# Altium PCB Sampler_4HP.PCBDOC (part 5 of 6)
Units mm, origin at the board's own origin, x right, y up, seen from the top; angles counter-clockwise.
Board outline 159.99 x 100 mm, 4 copper layers (Top, GP1(GND), L3, Bot), stack 1.648 mm thick; 546 components, 321 nets, 1657 pads, 795 vias.
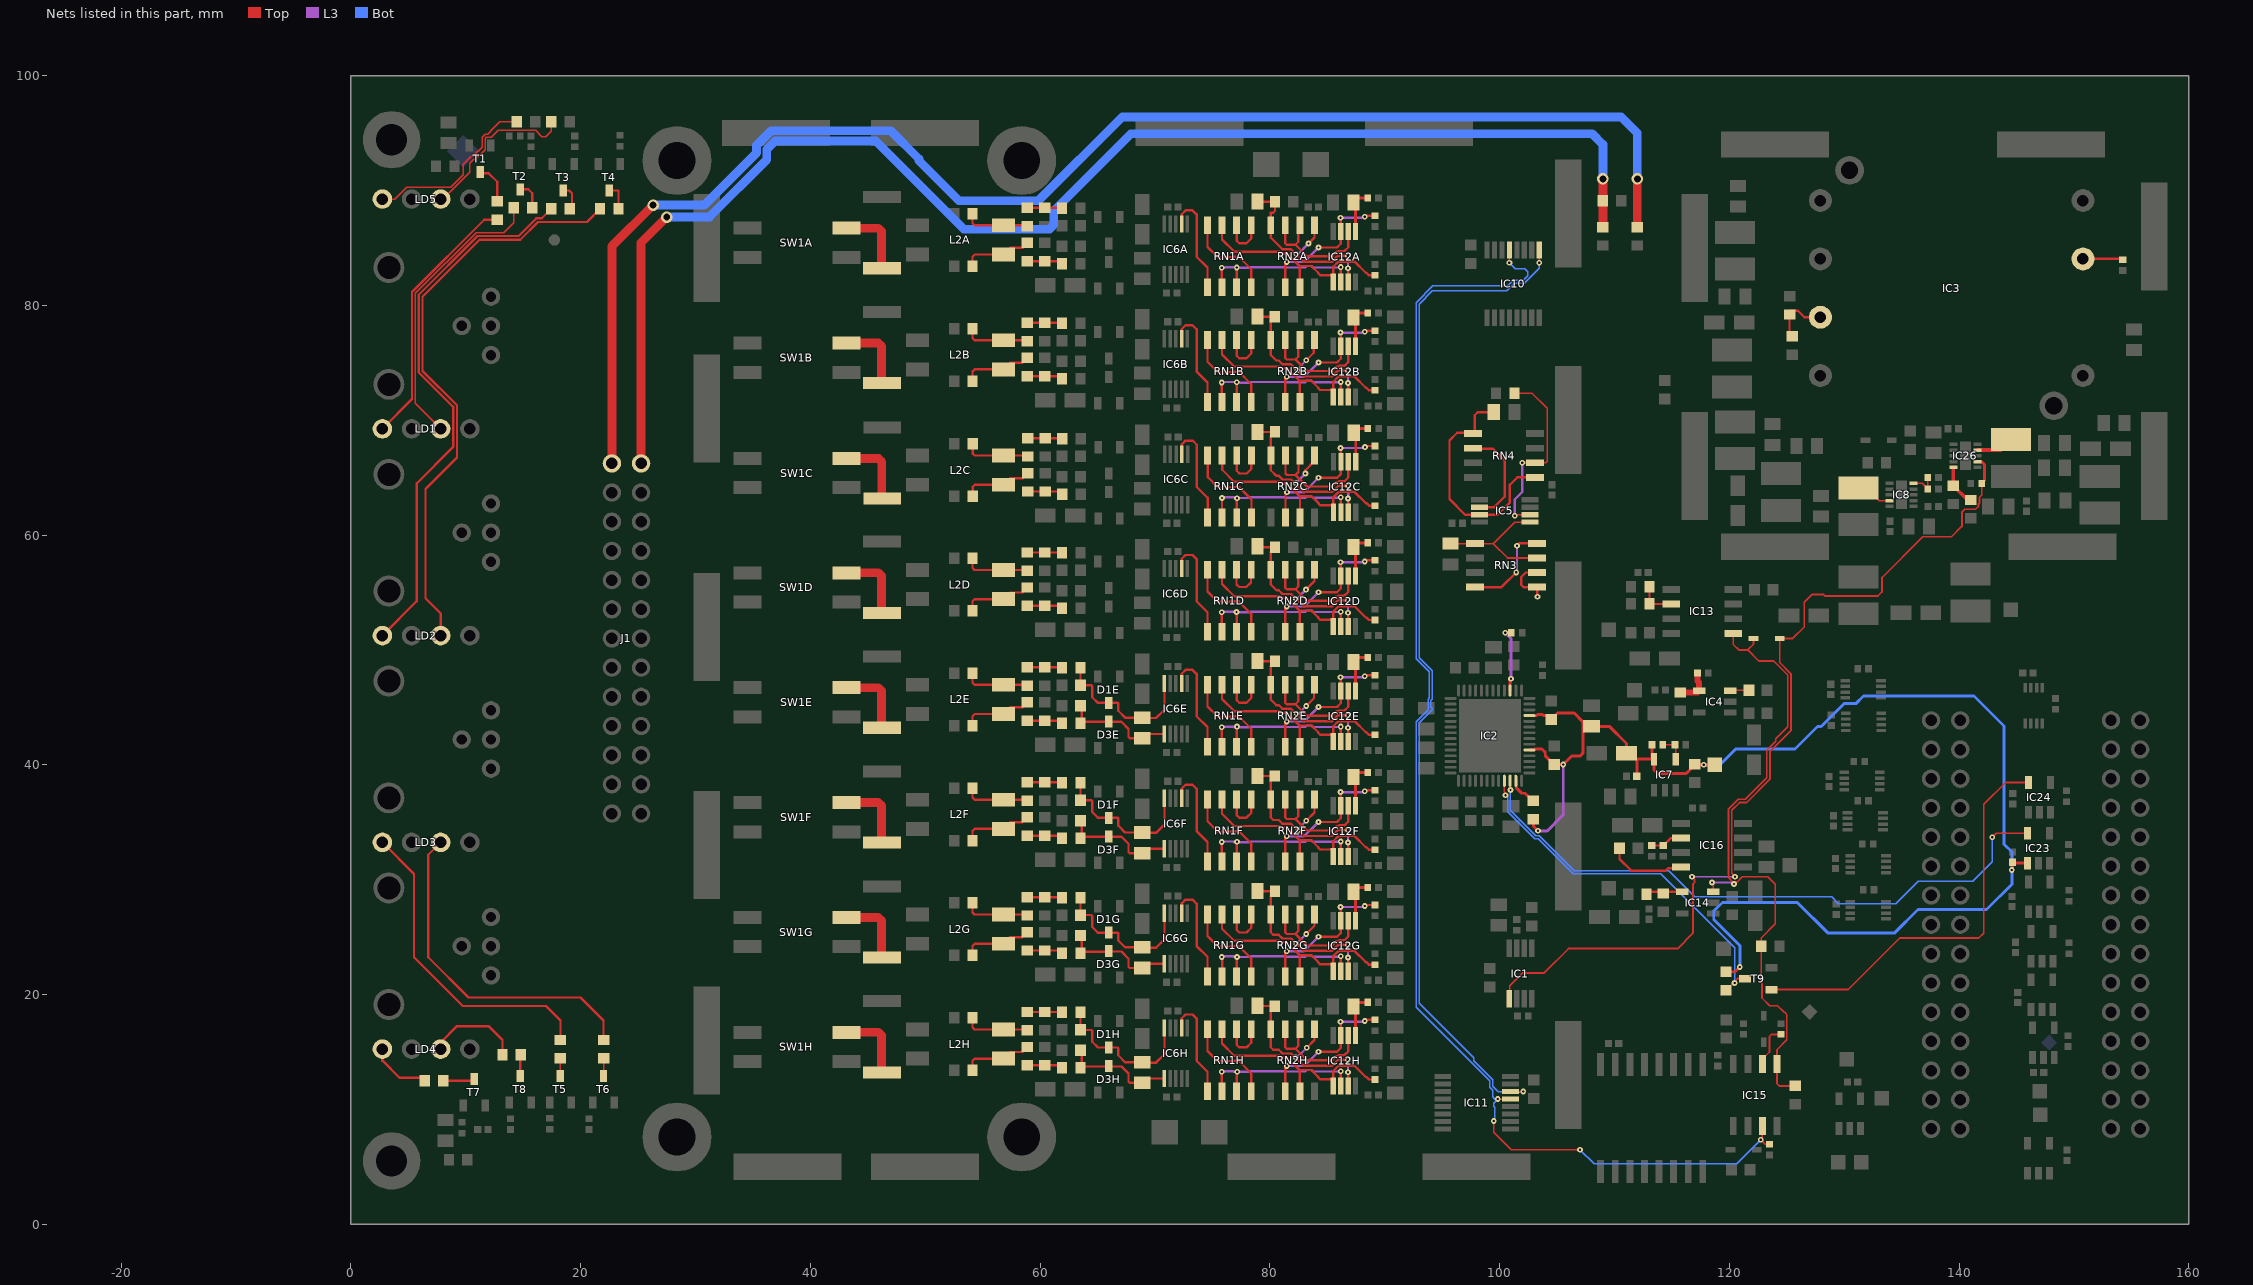
[diagram p6: the nets of this part, all layers, seen from the top]

## Via types
v1: diameter 0.5, hole 0.2, Top to Bot, tented both sides, 760 vias
v2: diameter 0.6, hole 0.3, Top to Bot, tented both sides, 15 vias
v3: diameter 1, hole 0.6, Top to Bot, tented both sides, 8 vias
v4: diameter 0.5, hole 0.2, Top to Bot, 6 vias
v5: diameter 0.6, hole 0.3, Top to Bot, 6 vias

## Nets (pads, with @x,y where several pads share a name; then routed paths per layer and width w, separated by ;. In a path a pad name is that pad's centre, name@x,y a point inside that pad or via, vN(x,y) a via of type N, cw(c..) or ccw(c..) an arc to the next point about the centre after c; other vN are vias at no path point) (continued)
NetC72E_1: C72E.1 C88E.2 D3E.3 IC6E.1 R42E.2 | length 9.7
  Top w0.203: C88E.2@63.638,45.02 63.638,43.736 65.949,43.736 D3E.3@65.955,43.742 ; D3E.3@65.989,43.776 D3E.3@65.955,43.742 ; IC6E.1@70.831,42.687 69.261,42.687 C72E.1@68.885,42.31 67.805,42.31 67.698,42.418 67.698,43.124 67.08,43.742 D3E.3@65.955,43.742
NetC72E_2: C72E.2 C85E.2 D1E.3 IC6E.10 R34E.2 | length 13.5
  Top w0.203: R34E.2@63.518,48.442 C85E.2@63.518,46.918 64.459,46.918 64.539,46.838 64.539,45.888 65.039,45.388 D1E.3@65.989,45.388 66.758,45.388 66.802,45.344 66.802,44.709 67.401,44.11 C72E.2@68.885,44.11 68.921,44.074 70.104,44.074 70.831,44.801 IC6E.10@70.831,47.087
NetC72F_1: C72F.1 C88F.2 D3F.3 IC6F.1 R42F.2 | length 9.7
  Top w0.203: C88F.2@63.638,35.02 63.638,33.736 65.949,33.736 D3F.3@65.955,33.742 ; D3F.3@65.989,33.776 D3F.3@65.955,33.742 ; IC6F.1@70.831,32.687 69.261,32.687 C72F.1@68.885,32.31 67.805,32.31 67.698,32.418 67.698,33.124 67.08,33.742 D3F.3@65.955,33.742
NetC72F_2: C72F.2 C85F.2 D1F.3 IC6F.10 R34F.2 | length 13.5
  Top w0.203: R34F.2@63.518,38.442 C85F.2@63.518,36.918 64.459,36.918 64.539,36.838 64.539,35.888 65.039,35.388 D1F.3@65.989,35.388 66.758,35.388 66.802,35.344 66.802,34.709 67.401,34.11 C72F.2@68.885,34.11 68.921,34.074 70.104,34.074 70.831,34.801 IC6F.10@70.831,37.087
NetC72G_1: C72G.1 C88G.2 D3G.3 IC6G.1 R42G.2 | length 9.7
  Top w0.203: C88G.2@63.638,25.02 63.638,23.736 65.949,23.736 D3G.3@65.955,23.742 ; D3G.3@65.989,23.776 D3G.3@65.955,23.742 ; IC6G.1@70.831,22.687 69.261,22.687 C72G.1@68.885,22.31 67.805,22.31 67.698,22.418 67.698,23.124 67.08,23.742 D3G.3@65.955,23.742
NetC72G_2: C72G.2 C85G.2 D1G.3 IC6G.10 R34G.2 | length 13.5
  Top w0.203: R34G.2@63.518,28.442 C85G.2@63.518,26.918 64.459,26.918 64.539,26.838 64.539,25.888 65.039,25.388 D1G.3@65.989,25.388 66.758,25.388 66.802,25.344 66.802,24.709 67.401,24.11 C72G.2@68.885,24.11 68.921,24.074 70.104,24.074 70.831,24.801 IC6G.10@70.831,27.087
NetC72H_1: C72H.1 C88H.2 D3H.3 IC6H.1 R42H.2 | length 9.7
  Top w0.203: C88H.2@63.638,15.02 63.638,13.736 65.949,13.736 D3H.3@65.955,13.742 ; D3H.3@65.989,13.776 D3H.3@65.955,13.742 ; IC6H.1@70.831,12.687 69.261,12.687 C72H.1@68.885,12.31 67.805,12.31 67.698,12.418 67.698,13.124 67.08,13.742 D3H.3@65.955,13.742
NetC72H_2: C72H.2 C85H.2 D1H.3 IC6H.10 R34H.2 | length 13.5
  Top w0.203: R34H.2@63.518,18.442 C85H.2@63.518,16.918 64.459,16.918 64.539,16.838 64.539,15.888 65.039,15.388 D1H.3@65.989,15.388 66.758,15.388 66.802,15.344 66.802,14.709 67.401,14.11 C72H.2@68.885,14.11 68.921,14.074 70.104,14.074 70.831,14.801 IC6H.10@70.831,17.087
NetC73A_2: C73A.2 IC12A.3 R73A.2 RN2A.1 RN2A.4 | length 18.6
  Top w0.203: C73A.2@78.925,88.775 C73A.2@78.925,89.025 80.425,89.025 R73A.2@80.45,89 80.45,88.225 80.295,88.07 80.08,88.07 RN2A.4@80.08,86.975 80.08,85.895 81.1,84.875 81.85,84.875 v1@82.25,84.475 ; v1(82.3,84.475) v1@82.25,84.475 ; v1(83.375,85.375) 83.89,85.89 RN2A.1@83.89,86.975 ; v1(86.8,84.325) 85.95,84.325 85.425,83.8 82.925,83.8 v1@82.25,84.475 ; v1(86.804,83.229) 86.825,83.208 IC12A.3@86.825,82.029
  L3 w0.203: v1(82.3,84.475) 82.475,84.475 v1(83.375,85.375) ; v1(86.8,84.325) 86.804,84.321 v1(86.804,83.229)
NetC73B_2: C73B.2 IC12B.3 R73B.2 RN2B.1 RN2B.4 | length 18.2
  Top w0.203: C73B.2@78.925,79.025 78.95,79 80.4,79 80.08,78.68 RN2B.4@80.08,76.975 80.08,75.675 80.559,75.196 80.779,75.196 81.1,74.875 81.85,74.875 v1(82.388,74.337) 82.925,73.8 85.425,73.8 85.95,74.325 v1(86.8,74.325) ; v1(83.175,75.225) 83.825,75.875 83.825,76.91 RN2B.1@83.89,76.975 ; v1(86.804,73.229) 86.825,73.208 IC12B.3@86.825,72.029
  L3 w0.203: v1(82.388,74.337) 82.388,74.438 v1(83.175,75.225) ; v1(86.8,74.325) 86.804,74.321 v1(86.804,73.229)
NetC73C_2: C73C.2 IC12C.3 R73C.2 RN2C.1 RN2C.4 | length 18.1
  Top w0.203: C73C.2@78.938,68.981 78.944,68.975 R73C.2@80.45,68.975 80.093,68.618 RN2C.4@80.093,66.932 80.093,65.65 80.59,65.153 80.791,65.153 81.113,64.831 81.863,64.831 82.938,63.756 85.438,63.756 85.963,64.281 v1(86.813,64.281) ; v1(83.1,65.35) 83.1,65.65 83.903,66.453 RN2C.1@83.903,66.932 ; v1(86.817,63.185) 86.838,63.165 IC12C.3@86.838,61.985
  L3 w0.203: v1(82.25,64.5) v1(83.1,65.35) ; v1(86.813,64.281) 86.817,64.277 v1(86.817,63.185)
NetC73D_2: C73D.2 IC12D.3 R73D.2 RN2D.1 RN2D.4 | length 18.2
  Top w0.203: C73D.2@78.925,59.025 79.025,58.925 R73D.2@80.45,58.925 80.08,58.555 RN2D.4@80.08,56.975 80.08,55.7 80.584,55.196 80.779,55.196 81.1,54.875 81.85,54.875 v1(82.275,54.45) 82.925,53.8 85.425,53.8 85.95,54.325 v1(86.8,54.325) ; v1(83.15,55.25) 83.89,55.99 RN2D.1@83.89,56.975 ; v1(86.804,53.229) 86.825,53.208 IC12D.3@86.825,52.029
  L3 w0.203: v1(82.275,54.45) 82.35,54.45 v1(83.15,55.25) ; v1(86.8,54.325) 86.804,54.321 v1(86.804,53.229)
NetC73E_2: C73E.2 IC12E.3 R73E.2 RN2E.1 RN2E.4 | length 18.3
  Top w0.203: C73E.2@78.925,49.025 78.95,49 R73E.2@80.45,49 80.08,48.63 RN2E.4@80.08,46.975 80.08,45.675 80.559,45.196 80.779,45.196 81.1,44.875 81.85,44.875 82.925,43.8 85.425,43.8 85.95,44.325 v1(86.8,44.325) ; v1(83.175,45.125) 83.85,45.8 83.85,46.935 RN2E.1@83.89,46.975 ; v1(86.804,43.229) 86.825,43.208 IC12E.3@86.825,42.029
  L3 w0.203: v1(82.35,44.45) 82.5,44.45 v1(83.175,45.125) ; v1(86.8,44.325) 86.804,44.321 v1(86.804,43.229)
NetC73F_2: C73F.2 IC12F.3 R73F.2 RN2F.1 RN2F.4 | length 18.4
  Top w0.203: C73F.2@78.925,39.025 R73F.2@80.425,39.025 80.08,38.68 RN2F.4@80.08,36.975 80.08,35.42 80.304,35.196 80.779,35.196 81.1,34.875 81.85,34.875 82.925,33.8 85.425,33.8 85.95,34.325 v1(86.8,34.325) ; v1(83.175,35.125) 83.89,35.84 RN2F.1@83.89,36.975 ; v1(86.804,33.229) 86.825,33.208 IC12F.3@86.825,32.029
  L3 w0.203: v1(82.485,34.275) 82.485,34.435 v1(83.175,35.125) ; v1(86.8,34.325) 86.804,34.321 v1(86.804,33.229)
NetC73G_2: C73G.2 IC12G.3 R73G.2 RN2G.1 RN2G.4 | length 18.4
  Top w0.203: C73G.2@78.925,29.025 78.95,29 R73G.2@80.45,29 80.08,28.63 RN2G.4@80.08,26.975 80.08,25.42 80.304,25.196 80.779,25.196 81.1,24.875 81.85,24.875 v1(82.3,24.425) 82.925,23.8 85.425,23.8 85.95,24.325 v1(86.8,24.325) ; v1(83.175,25.275) 83.89,25.99 RN2G.1@83.89,26.975 ; v1(86.804,23.229) 86.825,23.208 IC12G.3@86.825,22.029
  L3 w0.203: v1(82.3,24.425) 82.325,24.425 v1(83.175,25.275) ; v1(86.8,24.325) 86.804,24.321 v1(86.804,23.229)
NetC73H_2: C73H.2 IC12H.3 R73H.2 RN2H.1 RN2H.4 | length 18.3
  Top w0.203: C73H.2@78.95,19 R73H.2@80.425,19 80.08,18.655 RN2H.4@80.08,16.975 80.08,15.42 80.304,15.196 80.779,15.196 81.1,14.875 81.85,14.875 82.925,13.8 85.425,13.8 85.95,14.325 v1(86.8,14.325) ; v1(83.225,15.375) 83.89,16.04 RN2H.1@83.89,16.975 ; v1(86.804,13.229) 86.825,13.208 IC12H.3@86.825,12.029
  L3 w0.203: v1(82.25,14.525) 82.375,14.525 v1(83.225,15.375) ; v1(86.8,14.325) 86.804,14.321 v1(86.804,13.229)
NetC74A_2: C74A.2 IC12A.5 R50A.2 | length 4
  Top w0.254: IC12A.5@87.475,86.429 87.475,88.775 C74A.2@87.3,88.95 87.675,89.325 R50A.2@88.53,89.325
NetC74B_2: C74B.2 IC12B.5 R50B.2 | length 4
  Top w0.254: IC12B.5@87.475,76.429 87.475,78.775 C74B.2@87.3,78.95 87.675,79.325 R50B.2@88.53,79.325
NetC74C_2: C74C.2 IC12C.5 R50C.2 | length 4
  Top w0.254: IC12C.5@87.488,66.385 87.488,68.731 C74C.2@87.313,68.906 87.688,69.281 R50C.2@88.543,69.281
NetC74D_2: C74D.2 IC12D.5 R50D.2 | length 4
  Top w0.254: IC12D.5@87.475,56.429 87.475,58.775 C74D.2@87.3,58.95 87.675,59.325 R50D.2@88.53,59.325
NetC74E_2: C74E.2 IC12E.5 R50E.2 | length 4
  Top w0.254: IC12E.5@87.475,46.429 87.475,48.775 C74E.2@87.3,48.95 87.675,49.325 R50E.2@88.53,49.325
NetC74F_2: C74F.2 IC12F.5 R50F.2 | length 4
  Top w0.254: IC12F.5@87.475,36.429 87.475,38.775 C74F.2@87.3,38.95 87.675,39.325 R50F.2@88.53,39.325
NetC74G_2: C74G.2 IC12G.5 R50G.2 | length 4
  Top w0.254: IC12G.5@87.475,26.429 87.475,28.775 C74G.2@87.3,28.95 87.675,29.325 R50G.2@88.53,29.325
NetC74H_2: C74H.2 IC12H.5 R50H.2 | length 4
  Top w0.254: IC12H.5@87.475,16.429 87.475,18.775 C74H.2@87.3,18.95 87.675,19.325 R50H.2@88.53,19.325
NetC75_2: C75.2 IC5.3 RN4.1 RN4.5 | length 21.1
  Top w0.203: C75.2@99.5,70.7 98.125,70.7 97.85,70.425 97.85,68.98 RN4.5@97.7,68.83 97.63,68.9 96.325,68.9 95.646,68.221 95.646,63.129 97,61.775 IC5.3@98.25,61.775 99.85,61.775 100.9,62.825 100.9,64.375 101.545,65.02 RN4.1@103.1,65.02
NetC76_2: C76.2 IC5.5 RN3.3 RN3.5 | length 12
  Top w0.152: C76.2@95.75,59.25 99.45,59.25 ; IC5.5@102.65,61.125 101.325,61.125 99.45,59.25 ; RN3.3@103.275,58.01 100.69,58.01 99.45,59.25
NetC114_1: C114.1 IC16.4 | length 6.9
  Top w0.203: C114.1@110.45,32.75 110.45,31.8 111.479,30.771 114.448,30.771 114.677,31 115.705,31 IC16.4@115.8,31.095
NetC116_1: C116.1 IC4.3 | length 1.6
  Top w0.127: IC4.3@120.1,46.45 120.15,46.5 C116.1@121.7,46.5
NetD6_1: D6.1 IC1.1 IC26.7 R57.1 | length 81
  Top w0.152: IC1.1@100.888,19.687 100.899,19.698 100.899,20.75 102.036,21.887 103.887,21.887 106,24 115.5,24 116.836,25.336 116.836,29.592 116.973,29.728 116.973,30.027 v1(116.75,30.25) ; v1(120.5,30.25) 120.5,30.292 120.222,30.57 120.222,36.042 120.9,36.72 121.515,36.72 123.537,38.742 123.537,41.142 125.364,42.968 125.364,47.933 124.39,48.906 D6.1@124.39,51 125.525,51 126.525,52 126.525,54.15 127.209,54.834 128.192,54.834 128.326,54.7 132.95,54.7 133.3,55.05 133.3,56.3 136.847,59.847 139.347,59.847 140.25,60.75 140.25,62 140.5,62.25 141.437,62.25 141.703,62.516 141.703,62.703 141.779,62.779 141.779,63.283 141.97,63.474 R57.1@141.97,64.5
  Top w0.254: IC26.7@141.602,66.395 141.971,66.395 141.971,66.361 142.033,66.299 142.057,66.299 142.206,66.15 142.206,64.736 R57.1@141.97,64.5
  L3 w0.152: v1(116.75,30.25) v1(120.5,30.25)
NetD6_2: D6.2 IC13.5 IC14.3 IC15.1 R18.1 R52.2 | length 57.2
  Top w0.152: v1(118.5,29.75) 118.6,29.65 IC14.3@118.6,28.95 ; IC13.5@120.349,51.444 120.349,50.472 120.822,50 121.6,50 ; D6.2@122.11,51 122.11,50.51 121.6,50 ; R52.2@126,12.3 R52.2@125.75,12.05 124.35,12.05 124.155,12.245 IC15.1@124.155,13.95 124.155,15.205 125.013,16.063 125.013,18.262 124.825,18.45 124.775,18.45 124.2,19.025 123.525,19.025 122.85,19.7 122.85,21 122.775,21.075 R18.1@122.775,24.2 122.775,24.925 124,26.15 124,29.6 123.35,30.25 121.141,30.25 120.688,29.797 120.312,29.797 119.953,30.156 119.953,30.443 119.942,30.454 119.942,36.158 120.784,37 121.4,37 123.258,38.858 123.258,41.258 124.042,42.042 124.042,42.266 125.084,43.308 125.084,47.817 123.867,49.034 122.566,49.034 121.6,50
  L3 w0.152: v1(118.5,29.75) 120.265,29.75 120.392,29.623 v1(120.416,29.623)
NetIC2_23: IC2.23 R2.2 T9.3 | length 33.2
  Top w0.127: IC2.23@100.42,38.61 100.42,37.665 100.514,37.571 v1(100.514,37.349)
  Top w0.152: R2.2@119.312,19.98 R2.2@119.715,20.384 120.719,21.387 T9.3@121.385,21.387
  Bot w0.127: v1(100.514,37.349) 100.701,37.162 100.701,35.917 103.062,33.556 103.367,33.556 106.406,30.517 114.031,30.517 120.465,24.083 v1(120.465,21)
NetIC2_24: IC2.24 IC23.5 | length 54.7
  Top w0.127: IC2.24@100.92,38.61 100.92,37.837 v1(100.955,37.802) ; v1(142.9,33.7) 143.236,34.036 IC23.5@145.966,34.036
  Bot w0.127: v1(100.955,37.802) 100.955,36.022 103.168,33.81 103.473,33.81 106.511,30.771 114.729,30.771 117,28.5 128.9,28.5 129.475,27.925 134.5,27.925 136.45,29.875 141.2,29.875 142.9,31.575 v1(142.9,33.7)
NetIC2_25: IC2.25 R11.2 | length 2.4
  Top w0.254: IC2.25@101.42,38.61 101.459,38.571 101.459,38.004 101.938,37.525 102.225,37.525 R11.2@102.825,36.925
NetIC2_43: IC2.43 R10.1 | length 5.8
  Top w0.254: v1(100.5,51.5) R10.1@101.03,51.5 ; IC2.43@100.92,46.46 100.92,47.405 v1(101,47.485)
  L3 w0.254: v1(100.5,51.5) 101,51 v1(101,47.485)
NetIC3_2: IC3.2 R8.2 | length 3.5
  Top w0.203: IC3.2@150.79,84.04 154.18,84.04 R8.2@154.25,83.97
NetIC3_6: IC3.6 R7.1 R19.2 | length 5.2
  Top w0.203: R7.1@125.5,77.3 125.25,77.55 R19.2@125.25,79.2 125.25,79.53 125.97,79.53 126.54,78.96 IC3.6@127.93,78.96
NetIC4_4: IC4.4 R26.1 R27.2 | length 3.3
  Top w0.508: R26.1@115.75,46.3 117.25,46.3 IC4.4@117.375,46.425 ; R27.2@117.23,48 117.23,47.295 117.375,47.15 IC4.4@117.375,46.425 ; IC4.4@117.4,46.45 IC4.4@117.375,46.425
NetIC5_2: IC5.2 RN4.6 | length 8.9
  Top w0.203: RN4.6@97.7,67.56 97.739,67.521 99.429,67.521 100.45,66.5 100.45,63.348 99.527,62.425 IC5.2@98.25,62.425
NetIC5_6: IC5.6 R72.1 RN4.2 | length 16.5
  Top w0.152: R72.1@101.3,72.35 102.825,72.35 104.15,71.025 104.15,66.425 104.015,66.29 RN4.2@103.1,66.29 ; v1(101.325,61.675) 101.425,61.775 IC5.6@102.65,61.775
  Top w0.203: v1(101.975,66.3) 101.985,66.29 RN4.2@103.1,66.29
  L3 w0.203: v1(101.325,61.675) 101.325,63.1 101.975,63.75 v1(101.975,66.3)
NetIC6A_7: IC6A.7 RN1A.1 | length 9.2
  Top w0.203: IC6A.7@72.331,87.087 72.331,87.935 72.661,88.265 73.279,88.265 73.631,87.913 73.631,84.23 74.574,83.287 RN1A.1@74.574,81.577
NetIC6B_7: IC6B.7 RN1B.1 | length 9.2
  Top w0.203: IC6B.7@72.331,77.087 72.331,77.935 72.661,78.265 73.279,78.265 73.631,77.913 73.631,74.23 74.574,73.287 RN1B.1@74.574,71.577
NetIC6C_7: IC6C.7 RN1C.1 | length 9.2
  Top w0.203: IC6C.7@72.344,67.043 72.344,67.891 72.674,68.221 73.292,68.221 73.644,67.869 73.644,64.186 74.587,63.243 RN1C.1@74.587,61.533
NetIC6D_7: IC6D.7 RN1D.1 | length 9.2
  Top w0.203: IC6D.7@72.331,57.087 72.331,57.935 72.661,58.265 73.279,58.265 73.631,57.913 73.631,54.23 74.574,53.287 RN1D.1@74.574,51.577
NetIC6E_7: IC6E.7 RN1E.1 | length 9.2
  Top w0.203: IC6E.7@72.331,47.087 72.331,47.935 72.661,48.265 73.279,48.265 73.631,47.913 73.631,44.23 74.574,43.287 RN1E.1@74.574,41.577
NetIC6F_7: IC6F.7 RN1F.1 | length 9.2
  Top w0.203: IC6F.7@72.331,37.087 72.331,37.935 72.661,38.265 73.279,38.265 73.631,37.913 73.631,34.23 74.574,33.287 RN1F.1@74.574,31.577
NetIC6G_7: IC6G.7 RN1G.1 | length 9.2
  Top w0.203: IC6G.7@72.331,27.087 72.331,27.935 72.661,28.265 73.279,28.265 73.631,27.913 73.631,24.23 74.574,23.287 RN1G.1@74.574,21.577
NetIC6H_7: IC6H.7 RN1H.1 | length 9.2
  Top w0.203: IC6H.7@72.331,17.087 72.331,17.935 72.661,18.265 73.279,18.265 73.631,17.913 73.631,14.23 74.574,13.287 RN1H.1@74.574,11.577
NetIC7_4: IC7.4 R53.1 R54.2 | length 2.3
  Top w0.152: R53.1@114.22,41.75 R54.2@115.28,41.75 115.351,41.679 IC7.4@115.351,40.499
NetIC8_5: IC8.5 R24.1 R28.2 | length 2.4
  Top w0.127: IC8.5@136.05,64.5 136.78,64.5 R24.1@137.28,64 R28.2@137.28,65
NetIC8_9: IC8.9 L3.1 | length 3.2
  Top w0.127: L3.1@131.25,64.1 131.95,64.1 133.05,63 IC8.9@133.95,63
NetIC10_9: IC10.9 IC11.14 | length 89.1
  Top w0.127: IC11.14@100.955,11.557 v1(102.057,11.557) ; v1(103.46,83.715) IC10.9@103.46,84.817
  Bot w0.127: v1(102.057,11.557) 99.88,11.557 99.412,12.024 99.412,12.588 97.75,14.25 97.75,14.5 92.996,19.254 92.996,43.65 94.131,44.785 94.131,44.921 94.032,45.02 94.032,45.612 94.131,45.711 94.131,48.199 92.996,49.334 92.996,61.894 92.999,61.897 92.999,62.703 92.996,62.706 92.996,80.111 94.139,81.254 100.631,81.254 101.317,81.94 102.173,81.94 103.46,83.227 v1(103.46,83.715)
NetIC10_13: IC10.13 IC11.13 IC15.7 R51.2 | length 119.1
  Top w0.127: v1(99.5,9) 99.5,8 101,6.5 v1(107,6.5) ; v1(99.853,10.907) IC11.13@100.955,10.907 ; v1(100.86,83.715) IC10.13@100.86,84.817 ; IC15.7@122.885,8.55 122.885,7.485 v1(122.75,7.35) 123.13,6.97 R51.2@123.5,6.97
  Bot w0.127: v1(99.5,9) 99.581,9.081 99.581,10.182 99.5,10.264 99.5,10.554 v1(99.853,10.907) 99.593,10.907 99.408,11.092 99.408,11.67 99.158,11.919 99.158,12.482 92.742,18.899 92.742,43.755 93.778,44.792 93.778,45.717 93.877,45.816 93.877,48.094 92.742,49.229 92.742,61.999 92.745,62.002 92.745,62.598 92.742,62.601 92.742,80.242 94.204,81.704 100.722,81.704 101.212,82.194 102.067,82.194 102.441,82.568 102.441,82.932 102.182,83.19 101.384,83.19 v1(100.86,83.715) ; v1(107,6.5) 108.25,5.25 120.65,5.25 v1(122.75,7.35)
NetIC12A_1: IC12A.1 R14A.1 RN1A.7 RN2A.7 | length 19.7
  Top w0.203: RN1A.7@75.844,86.977 75.844,85.731 76.9,84.675 80.833,84.675 80.963,84.545 81.466,84.545 82.62,83.39 ; RN2A.7@82.62,81.575 82.62,83.39 ; IC12A.1@85.525,82.029 IC12A.1@85.525,82.626 ; R14A.1@89.159,82.606 88.629,82.606 88.409,82.826 88.349,82.826 87.371,83.804 85.977,83.804 85.525,83.352 IC12A.1@85.525,82.626 ; 82.62,83.39 82.659,83.429 83.623,83.429 84.221,82.831 84.221,82.79 84.385,82.626 IC12A.1@85.525,82.626
NetIC12A_2: IC12A.2 RN1A.2 RN1A.3 | length 15
  Top w0.203: v1(75.825,83.275) 75.825,81.597 RN1A.2@75.844,81.577 ; RN1A.3@77.114,81.577 77.114,83.289 v1(77.125,83.3) ; IC12A.2@86.175,82.029 v1(86.175,83.325)
  L3 w0.203: v1(75.825,83.275) 75.875,83.325 76.848,83.325 ; v1@77.125,83.271 78.296,83.271 78.35,83.325 81.259,83.325 81.287,83.297 83.095,83.297 83.227,83.429 83.623,83.429 83.755,83.297 86.147,83.297 v1(86.175,83.325)
NetIC12A_6: IC12A.6 RN2A.2 RN2A.3 | length 11.1
  Top w0.203: RN2A.3@81.35,86.975 81.35,85.41 81.485,85.275 82.235,85.275 ; RN2A.2@82.62,86.975 82.485,86.84 82.485,85.525 82.235,85.275 ; IC12A.6@86.825,86.429 86.825,85.054 86.5,84.729 86.021,84.729 85.947,84.655 85.813,84.655 85.433,84.275 83.235,84.275 82.235,85.275
NetIC12A_7: IC12A.7 R16A.1 RN2A.6 | length 13
  Top w0.203: RN2A.6@81.35,81.575 81.35,83.64 v1(81.485,83.775) ; v1(84.235,85.025) 85.85,85.025 86.175,85.35 IC12A.7@86.175,86.429 86.175,87.6 v1(86.15,87.625) ; v1(88.275,87.7) 88.371,87.796 R16A.1@89.159,87.796
  L3 w0.203: v1(81.485,83.775) 82.985,83.775 v1(84.235,85.025) ; v1(86.15,87.625) 88.2,87.625 v1(88.275,87.7)
NetIC12B_1: IC12B.1 R14B.1 RN1B.7 RN2B.7 | length 19.7
  Top w0.203: RN1B.7@75.844,76.977 75.844,75.731 76.9,74.675 80.833,74.675 80.963,74.545 81.466,74.545 82.62,73.39 ; RN2B.7@82.62,71.575 82.62,73.39 ; IC12B.1@85.525,72.029 IC12B.1@85.525,72.626 ; R14B.1@89.159,72.606 88.629,72.606 88.409,72.826 88.349,72.826 87.371,73.804 85.977,73.804 85.525,73.352 IC12B.1@85.525,72.626 ; 82.62,73.39 82.659,73.429 83.623,73.429 84.221,72.831 84.221,72.79 84.385,72.626 IC12B.1@85.525,72.626
NetIC12B_2: IC12B.2 RN1B.2 RN1B.3 | length 15
  Top w0.203: v1(75.825,73.275) 75.825,71.597 RN1B.2@75.844,71.577 ; RN1B.3@77.114,71.577 77.114,73.289 v1(77.125,73.3) ; IC12B.2@86.175,72.029 v1(86.175,73.325)
  L3 w0.203: v1(75.825,73.275) 75.875,73.325 76.848,73.325 ; v1@77.125,73.271 78.296,73.271 78.35,73.325 81.259,73.325 81.287,73.297 83.095,73.297 83.227,73.429 83.623,73.429 83.755,73.297 86.147,73.297 v1(86.175,73.325)
NetIC12B_6: IC12B.6 RN2B.2 RN2B.3 | length 11.1
  Top w0.203: RN2B.3@81.35,76.975 81.35,75.41 81.485,75.275 82.235,75.275 ; RN2B.2@82.62,76.975 82.485,76.84 82.485,75.525 82.235,75.275 ; IC12B.6@86.825,76.429 86.825,75.054 86.5,74.729 86.021,74.729 85.947,74.655 85.813,74.655 85.433,74.275 83.235,74.275 82.235,75.275
NetIC12B_7: IC12B.7 R16B.1 RN2B.6 | length 13
  Top w0.203: RN2B.6@81.35,71.575 81.35,73.64 v1(81.485,73.775) ; v1(84.235,75.025) 85.85,75.025 86.175,75.35 86.175,77.6 v1(86.15,77.625) ; v1(88.275,77.7) 88.371,77.796 R16B.1@89.159,77.796
  L3 w0.203: v1(81.485,73.775) 82.985,73.775 v1(84.235,75.025) ; v1(86.15,77.625) 88.2,77.625 v1(88.275,77.7)
NetIC12C_1: IC12C.1 R14C.1 RN1C.7 RN2C.7 | length 19.7
  Top w0.203: RN1C.7@75.857,66.933 75.857,65.687 76.913,64.631 80.846,64.631 80.976,64.501 81.479,64.501 82.633,63.347 ; RN2C.7@82.633,61.532 82.633,63.347 ; IC12C.1@85.538,61.985 IC12C.1@85.538,62.582 ; R14C.1@89.172,62.562 88.642,62.562 88.422,62.782 88.361,62.782 87.384,63.76 85.989,63.76 85.538,63.308 IC12C.1@85.538,62.582 ; 82.633,63.347 82.671,63.385 83.636,63.385 84.233,62.787 84.233,62.746 84.397,62.582 IC12C.1@85.538,62.582
NetIC12C_2: IC12C.2 RN1C.2 RN1C.3 | length 14.9
  Top w0.203: v1(75.838,63.231) 75.838,61.553 RN1C.2@75.857,61.533 ; RN1C.3@77.127,61.533 77.127,63.177 v1(77.15,63.2) ; IC12C.2@86.188,61.985 v1(86.188,63.281)
  L3 w0.203: v1(75.838,63.231) 75.888,63.281 76.861,63.281 ; v1@77.15,63.228 78.309,63.228 78.363,63.281 81.271,63.281 81.3,63.253 83.107,63.253 83.239,63.385 83.636,63.385 83.768,63.253 86.159,63.253 v1(86.188,63.281)
NetIC12C_6: IC12C.6 RN2C.2 RN2C.3 | length 11.1
  Top w0.203: RN2C.3@81.363,66.932 81.363,65.367 81.498,65.232 82.248,65.232 ; RN2C.2@82.633,66.932 82.498,66.797 82.498,65.482 82.248,65.232 ; IC12C.6@86.838,66.385 86.838,65.01 86.513,64.685 86.033,64.685 85.96,64.611 85.826,64.611 85.446,64.232 83.248,64.232 82.248,65.232
NetIC12C_7: IC12C.7 R16C.1 RN2C.6 | length 13
  Top w0.203: RN2C.6@81.363,61.532 81.363,63.597 v1(81.498,63.732) ; v1(84.248,64.982) 85.863,64.982 86.188,65.306 IC12C.7@86.188,66.385 86.188,67.556 v1(86.163,67.581) ; v1(88.288,67.656) 88.384,67.752 R16C.1@89.172,67.752
  L3 w0.203: v1(81.498,63.732) 82.998,63.732 v1(84.248,64.982) ; v1(86.163,67.581) 88.213,67.581 v1(88.288,67.656)
NetIC12D_1: IC12D.1 R14D.1 RN1D.7 RN2D.7 | length 19.7
  Top w0.203: RN1D.7@75.844,56.977 75.844,55.731 76.9,54.675 80.833,54.675 80.963,54.545 81.466,54.545 82.62,53.39 ; RN2D.7@82.62,51.575 82.62,53.39 ; IC12D.1@85.525,52.029 IC12D.1@85.525,52.626 ; R14D.1@89.159,52.606 88.629,52.606 88.409,52.826 88.349,52.826 87.371,53.804 85.977,53.804 85.525,53.352 IC12D.1@85.525,52.626 ; 82.62,53.39 82.659,53.429 83.623,53.429 84.221,52.831 84.221,52.79 84.385,52.626 IC12D.1@85.525,52.626
NetIC12D_2: IC12D.2 RN1D.2 RN1D.3 | length 15
  Top w0.203: v1(75.825,53.275) 75.825,51.597 RN1D.2@75.844,51.577 ; v1(77.1,53.3) 77.114,53.286 RN1D.3@77.114,51.577 ; IC12D.2@86.175,52.029 v1(86.175,53.325)
  L3 w0.203: v1(75.825,53.275) 75.875,53.325 76.848,53.325 ; v1@77.1,53.271 78.296,53.271 78.35,53.325 81.259,53.325 81.287,53.297 83.095,53.297 83.227,53.429 83.623,53.429 83.755,53.297 86.147,53.297 v1(86.175,53.325)
NetIC12D_6: IC12D.6 RN2D.2 RN2D.3 | length 11.1
  Top w0.203: RN2D.3@81.35,56.975 81.35,55.41 81.485,55.275 82.235,55.275 ; RN2D.2@82.62,56.975 82.485,56.84 82.485,55.525 82.235,55.275 ; IC12D.6@86.825,56.429 86.825,55.054 86.5,54.729 86.021,54.729 85.947,54.655 85.813,54.655 85.433,54.275 83.235,54.275 82.235,55.275
NetIC12D_7: IC12D.7 R16D.1 RN2D.6 | length 13
  Top w0.203: RN2D.6@81.35,51.575 81.35,53.64 v1(81.485,53.775) ; v1(84.235,55.025) 85.85,55.025 86.175,55.35 86.175,57.6 v1(86.15,57.625) ; v1(88.275,57.7) 88.371,57.796 R16D.1@89.159,57.796
  L3 w0.203: v1(81.485,53.775) 82.985,53.775 v1(84.235,55.025) ; v1(86.15,57.625) 88.2,57.625 v1(88.275,57.7)
NetIC12E_1: IC12E.1 R14E.1 RN1E.7 RN2E.7 | length 19.7
  Top w0.203: RN1E.7@75.844,46.977 75.844,45.731 76.9,44.675 80.833,44.675 80.963,44.545 81.466,44.545 82.62,43.39 ; RN2E.7@82.62,41.575 82.62,43.39 ; IC12E.1@85.525,42.029 IC12E.1@85.525,42.626 ; R14E.1@89.159,42.606 88.629,42.606 88.409,42.826 88.349,42.826 87.371,43.804 85.977,43.804 85.525,43.352 IC12E.1@85.525,42.626 ; 82.62,43.39 82.659,43.429 83.623,43.429 84.221,42.831 84.221,42.79 84.385,42.626 IC12E.1@85.525,42.626
NetIC12E_2: IC12E.2 RN1E.2 RN1E.3 | length 15.1
  Top w0.203: v1(75.825,43.275) 75.825,41.597 RN1E.2@75.844,41.577 ; RN1E.3@77.114,41.577 77.114,43.289 v1(77.15,43.325) ; IC12E.2@86.175,42.029 v1(86.175,43.325)
  L3 w0.203: v1(75.825,43.275) 75.875,43.325 76.848,43.325 76.902,43.271 ; v1@77.15,43.271 78.296,43.271 78.35,43.325 81.259,43.325 81.287,43.297 83.095,43.297 83.227,43.429 83.623,43.429 83.755,43.297 86.147,43.297 v1(86.175,43.325)
NetIC12E_6: IC12E.6 RN2E.2 RN2E.3 | length 11.1
  Top w0.203: RN2E.3@81.35,46.975 81.35,45.41 81.485,45.275 82.235,45.275 ; RN2E.2@82.62,46.975 82.485,46.84 82.485,45.525 82.235,45.275 ; IC12E.6@86.825,46.429 86.825,45.054 86.5,44.729 86.021,44.729 85.947,44.655 85.813,44.655 85.433,44.275 83.235,44.275 82.235,45.275
NetIC12E_7: IC12E.7 R16E.1 RN2E.6 | length 13
  Top w0.203: RN2E.6@81.35,41.575 81.35,43.64 v1(81.485,43.775) ; v1(84.235,45.025) 85.85,45.025 86.175,45.35 86.175,47.6 v1(86.15,47.625) ; v1(88.275,47.7) 88.371,47.796 R16E.1@89.159,47.796
  L3 w0.203: v1(81.485,43.775) 82.985,43.775 v1(84.235,45.025) ; v1(86.15,47.625) 88.2,47.625 v1(88.275,47.7)
NetIC12F_1: IC12F.1 R14F.1 RN1F.7 RN2F.7 | length 19.7
  Top w0.203: RN1F.7@75.844,36.977 75.844,35.731 76.9,34.675 80.833,34.675 80.963,34.545 81.466,34.545 82.62,33.39 ; RN2F.7@82.62,31.575 82.62,33.39 ; IC12F.1@85.525,32.029 IC12F.1@85.525,32.626 ; R14F.1@89.159,32.606 88.629,32.606 88.409,32.826 88.349,32.826 87.371,33.804 85.977,33.804 85.525,33.352 IC12F.1@85.525,32.626 ; 82.62,33.39 82.659,33.429 83.623,33.429 84.221,32.831 84.221,32.79 84.385,32.626 IC12F.1@85.525,32.626
NetIC12F_2: IC12F.2 RN1F.2 RN1F.3 | length 15
  Top w0.203: v1(75.825,33.275) 75.825,31.597 RN1F.2@75.844,31.577 ; RN1F.3@77.114,31.577 77.114,33.264 v1(77.15,33.3) ; IC12F.2@86.175,32.029 v1(86.175,33.325)
  L3 w0.203: v1(75.825,33.275) 75.875,33.325 76.848,33.325 76.902,33.271 ; v1@77.15,33.271 78.296,33.271 78.35,33.325 81.259,33.325 81.287,33.297 83.095,33.297 83.227,33.429 83.623,33.429 83.755,33.297 86.147,33.297 v1(86.175,33.325)
NetIC12F_6: IC12F.6 RN2F.2 RN2F.3 | length 11.1
  Top w0.203: RN2F.3@81.35,36.975 81.35,35.41 81.485,35.275 82.235,35.275 ; RN2F.2@82.62,36.975 82.485,36.84 82.485,35.525 82.235,35.275 ; IC12F.6@86.825,36.429 86.825,35.054 86.5,34.729 86.021,34.729 85.947,34.655 85.813,34.655 85.433,34.275 83.235,34.275 82.235,35.275
NetIC12F_7: IC12F.7 R16F.1 RN2F.6 | length 13
  Top w0.203: RN2F.6@81.35,31.575 81.35,33.64 v1(81.485,33.775) ; v1(84.235,35.025) 85.85,35.025 86.175,35.35 IC12F.7@86.175,36.429 86.175,37.6 v1(86.15,37.625) ; v1(88.275,37.7) 88.371,37.796 R16F.1@89.159,37.796
  L3 w0.203: v1(81.485,33.775) 82.985,33.775 v1(84.235,35.025) ; v1(86.15,37.625) 88.2,37.625 v1(88.275,37.7)
NetIC12G_1: IC12G.1 R14G.1 RN1G.7 RN2G.7 | length 19.7
  Top w0.203: RN1G.7@75.844,26.977 75.844,25.731 76.9,24.675 80.833,24.675 80.963,24.545 81.466,24.545 82.62,23.39 ; RN2G.7@82.62,21.575 82.62,23.39 ; IC12G.1@85.525,22.029 IC12G.1@85.525,22.626 ; R14G.1@89.159,22.606 88.629,22.606 88.409,22.826 88.349,22.826 87.371,23.804 85.977,23.804 85.525,23.352 IC12G.1@85.525,22.626 ; 82.62,23.39 82.659,23.429 83.623,23.429 84.221,22.831 84.221,22.79 84.385,22.626 IC12G.1@85.525,22.626
NetIC12G_2: IC12G.2 RN1G.2 RN1G.3 | length 15.3
  Top w0.203: v1(75.825,23.275) 75.854,23.246 75.854,22.327 75.825,22.298 75.825,21.597 RN1G.2@75.844,21.577 ; RN1G.3@77.114,21.577 77.114,23.236 v1(77.15,23.271) ; IC12G.2@86.175,22.029 v1(86.175,23.325)
  L3 w0.203: v1(75.825,23.275) 75.875,23.325 76.848,23.325 76.902,23.271 v1(77.15,23.271) 78.296,23.271 78.35,23.325 81.259,23.325 81.287,23.297 83.095,23.297 83.227,23.429 83.623,23.429 83.755,23.297 86.147,23.297 v1(86.175,23.325)
NetIC12G_6: IC12G.6 RN2G.2 RN2G.3 | length 11.1
  Top w0.203: RN2G.3@81.35,26.975 81.35,25.41 81.485,25.275 82.235,25.275 ; RN2G.2@82.62,26.975 82.485,26.84 82.485,25.525 82.235,25.275 ; IC12G.6@86.825,26.429 86.825,25.054 86.5,24.729 86.021,24.729 85.947,24.655 85.813,24.655 85.433,24.275 83.235,24.275 82.235,25.275
NetIC12G_7: IC12G.7 R16G.1 RN2G.6 | length 13
  Top w0.203: RN2G.6@81.35,21.575 81.35,23.64 v1(81.485,23.775) ; v1(84.235,25.025) 85.85,25.025 86.175,25.35 86.175,27.6 v1(86.15,27.625) ; v1(88.275,27.7) 88.371,27.796 R16G.1@89.159,27.796
  L3 w0.203: v1(81.485,23.775) 82.985,23.775 v1(84.235,25.025) ; v1(86.15,27.625) 88.2,27.625 v1(88.275,27.7)
NetIC12H_1: IC12H.1 R14H.1 RN1H.7 RN2H.7 | length 19.7
  Top w0.203: RN1H.7@75.844,16.977 75.844,15.731 76.9,14.675 80.833,14.675 80.963,14.545 81.466,14.545 82.62,13.39 ; RN2H.7@82.62,11.575 82.62,13.39 ; IC12H.1@85.525,12.029 IC12H.1@85.525,12.626 ; R14H.1@89.159,12.606 88.629,12.606 88.409,12.826 88.349,12.826 87.371,13.804 85.977,13.804 85.525,13.352 IC12H.1@85.525,12.626 ; 82.62,13.39 82.659,13.429 83.623,13.429 84.221,12.831 84.221,12.79 84.385,12.626 IC12H.1@85.525,12.626
NetIC12H_2: IC12H.2 RN1H.2 RN1H.3 | length 15.3
  Top w0.203: v1(75.825,13.275) 75.825,11.597 RN1H.2@75.844,11.577 ; RN1H.3@77.114,11.577 77.114,13.211 v1(77.175,13.271) ; IC12H.2@86.175,12.029 v1(86.175,13.325)
  L3 w0.203: v1(75.825,13.275) 75.875,13.325 76.848,13.325 76.902,13.271 v1(77.175,13.271) 78.296,13.271 78.35,13.325 81.259,13.325 81.287,13.297 83.095,13.297 83.227,13.429 83.623,13.429 83.755,13.297 86.147,13.297 v1(86.175,13.325)
NetIC12H_6: IC12H.6 RN2H.2 RN2H.3 | length 11.1
  Top w0.203: RN2H.3@81.35,16.975 81.35,15.41 81.485,15.275 82.235,15.275 ; RN2H.2@82.62,16.975 82.485,16.84 82.485,15.525 82.235,15.275 ; IC12H.6@86.825,16.429 86.825,15.054 86.5,14.729 86.021,14.729 85.947,14.655 85.813,14.655 85.433,14.275 83.235,14.275 82.235,15.275
NetIC12H_7: IC12H.7 R16H.1 RN2H.6 | length 13
  Top w0.203: RN2H.6@81.35,11.575 81.35,13.64 v1(81.485,13.775) ; v1(84.235,15.025) 85.85,15.025 86.175,15.35 86.175,17.6 v1(86.15,17.625) ; v1(88.275,17.7) 88.371,17.796 R16H.1@89.159,17.796
  L3 w0.203: v1(81.485,13.775) 82.985,13.775 v1(84.235,15.025) ; v1(86.15,17.625) 88.2,17.625 v1(88.275,17.7)
NetIC13_2: IC13.2 R142.1 R143.2 | length 3.4
  Top w0.203: R143.2@113.05,55.5 R142.1@113.05,54 114.934,54 IC13.2@114.949,53.984
NetIC14_4: IC14.4 R32.1 R38.2 | length 3.2
  Top w0.254: R38.2@112.8,28.75 113,28.95 IC14.4@115.9,28.95
NetIC15_2: IC15.2 R23.1 | length 3.7
  Top w0.152: IC15.2@122.885,13.95 122.885,14.385 123.5,15 123.5,16.35 123.68,16.53 R23.1@124.5,16.53
NetIC16_2: IC16.2 R25.1 R29.2 | length 2.8
  Top w0.203: R25.1@113.25,32.97 R29.2@114.25,32.97 114.915,33.635 IC16.2@115.8,33.635
NetIC24_5: IC24.5 T9.1 | length 36.4
  Top w0.152: T9.1@123.685,20.437 130.362,20.437 134.85,24.925 141.725,24.925 142.15,25.35 142.15,36.55 144.06,38.46 IC24.5@146.053,38.46
NetIC26_5: IC26.5 R20.1 R21.2 | length 3.4
  Top w0.305: R21.2@139.5,64.3 140.75,63.05 R20.1@141,63.05 ; R21.2@139.502,64.549 IC26.5@139.502,65.895
NetIC26_9: IC26.9 L5.1 | length 3.3
  Top w0.33: IC26.9@141.602,67.395 143.605,67.395 L5.1@144.525,68.315
NetJ1_25: J1.25 R3.1 R74.1 | length 122
  Top w0.762: J1.25@25.27,66.24 25.27,85.443 v3(27.508,87.681) ; R3.1@109,86.8 v3(109,91)
  Bot w0.762: v3(27.508,87.681) 31.217,87.681 36.217,92.681 36.217,93.564 36.962,94.309 45.691,94.309 53.375,86.625 60.825,86.625 61.205,87.005 61.205,88.205 67.925,94.925 108.075,94.925 109,94 v3(109,91)
NetJ1_26: J1.26 R6.1 | length 127.1
  Top w0.762: J1.26@22.73,66.24 22.73,85.138 v3(26.314,88.722) ; R6.1@112,86.8 v3(112,91)
  Bot w0.762: v3(26.314,88.722) 30.759,88.722 35.328,93.291 35.328,93.932 36.594,95.198 47.002,95.198 49.458,92.742 49.458,92.574 52.94,89.092 59.853,89.092 67.154,96.393 110.607,96.393 112,95 v3(112,91)
NetL2A_3: L2A.3 R37A.2 R41A.1 | length 6.1
  Top w0.203: R37A.2@54.12,83.408 54.12,84.233 54.311,84.424 L2A.3@56.816,84.424 57.392,85 58.476,85 R41A.1@58.908,85.432
NetL2A_4: L2A.4 R33A.1 R86A.2 | length 5.7
  Top w0.203: R86A.2@54.12,87.98 54.12,87.149 54.305,86.964 L2A.4@56.816,86.964 58.824,86.964 R33A.1@58.908,86.88
NetL2B_3: L2B.3 R37B.2 R41B.1 | length 6.1
  Top w0.203: R37B.2@54.12,73.408 54.12,74.233 54.311,74.424 L2B.3@56.816,74.424 57.392,75 58.476,75 R41B.1@58.908,75.432
NetL2B_4: L2B.4 R33B.1 R86B.2 | length 5.7
  Top w0.203: R86B.2@54.12,77.98 54.12,77.149 54.305,76.964 L2B.4@56.816,76.964 58.824,76.964 R33B.1@58.908,76.88
NetL2C_3: L2C.3 R37C.2 R41C.1 | length 6.1
  Top w0.203: R37C.2@54.133,63.364 54.133,64.189 54.323,64.38 L2C.3@56.829,64.38 57.405,64.956 58.489,64.956 R41C.1@58.921,65.388
NetL2C_4: L2C.4 R33C.1 R86C.2 | length 5.7
  Top w0.203: R86C.2@54.133,67.936 54.133,67.105 54.318,66.92 L2C.4@56.829,66.92 58.837,66.92 R33C.1@58.921,66.836
NetL2D_3: L2D.3 R37D.2 R41D.1 | length 6.1
  Top w0.203: R37D.2@54.12,53.408 54.12,54.233 54.311,54.424 L2D.3@56.816,54.424 57.392,55 58.476,55 R41D.1@58.908,55.432
NetL2D_4: L2D.4 R33D.1 R86D.2 | length 5.7
  Top w0.203: R86D.2@54.12,57.98 54.12,57.149 54.305,56.964 L2D.4@56.816,56.964 58.824,56.964 R33D.1@58.908,56.88
NetL2E_3: L2E.3 R37E.2 R41E.1 | length 6.1
  Top w0.203: R37E.2@54.12,43.408 54.12,44.233 54.311,44.424 L2E.3@56.816,44.424 57.392,45 58.476,45 R41E.1@58.908,45.432
NetL2E_4: L2E.4 R33E.1 R86E.2 | length 5.7
  Top w0.203: R86E.2@54.12,47.98 54.12,47.149 54.305,46.964 L2E.4@56.816,46.964 58.824,46.964 R33E.1@58.908,46.88
NetL2F_3: L2F.3 R37F.2 R41F.1 | length 6.1
  Top w0.203: R37F.2@54.12,33.408 54.12,34.233 54.311,34.424 L2F.3@56.816,34.424 57.392,35 58.476,35 R41F.1@58.908,35.432
NetL2F_4: L2F.4 R33F.1 R86F.2 | length 5.7
  Top w0.203: R86F.2@54.12,37.98 54.12,37.149 54.305,36.964 L2F.4@56.816,36.964 58.824,36.964 R33F.1@58.908,36.88
NetL2G_3: L2G.3 R37G.2 R41G.1 | length 6.1
  Top w0.203: R37G.2@54.12,23.408 54.12,24.233 54.311,24.424 L2G.3@56.816,24.424 57.392,25 58.476,25 R41G.1@58.908,25.432
NetL2G_4: L2G.4 R33G.1 R86G.2 | length 5.7
  Top w0.203: R86G.2@54.12,27.98 54.12,27.149 54.305,26.964 L2G.4@56.816,26.964 58.824,26.964 R33G.1@58.908,26.88
NetL2H_3: L2H.3 R37H.2 R41H.1 | length 6.1
  Top w0.203: R37H.2@54.12,13.408 54.12,14.233 54.311,14.424 L2H.3@56.816,14.424 57.392,15 58.476,15 R41H.1@58.908,15.432
NetL2H_4: L2H.4 R33H.1 R86H.2 | length 5.7
  Top w0.203: R86H.2@54.12,17.98 54.12,17.149 54.305,16.964 L2H.4@56.816,16.964 58.824,16.964 R33H.1@58.908,16.88
NetLD1_1: LD1.1 R58.1 | length 23
  Top w0.203: LD1.1@2.75,69.25 5.336,71.836 5.336,81.162 11.624,87.45 R58.1@12.75,87.45
NetLD1_3: LD1.3 R59.1 | length 25.1
  Top w0.127: LD1.3@7.83,69.25 5.628,71.452 5.628,81.041 10.915,86.329 13.329,86.329 14.2,87.2 R59.1@14.2,88.5
NetLD2_1: LD2.1 R60.1 | length 48.1
  Top w0.203: LD2.1@2.75,51.25 5.75,54.25 5.75,64.5 8.909,67.659 8.909,71.166 5.92,74.155 5.92,80.92 11.036,86.036 14.613,86.036 16.157,87.58 16.63,87.58 R60.1@17.45,88.4
NetLD2_3: LD2.3 R61.1 | length 51.1
  Top w0.203: LD2.3@7.83,51.25 7.83,53.17 6.5,54.5 6.5,64 9.25,66.75 9.25,71.292 6.25,74.292 6.25,80.75 11.206,85.706 14.75,85.706 16.294,87.25 20.55,87.25 R61.1@21.7,88.4
NetLD3_1: LD3.1 R62.1 | length 27.9
  Top w0.203: LD3.1@2.75,33.25 5.5,30.5 5.5,23.25 9.75,19 17,19 18.25,17.75 R62.1@18.25,16.05
NetLD3_3: LD3.3 R63.1 | length 29.7
  Top w0.203: LD3.3@7.83,33.25 6.75,32.17 6.75,23.25 10.25,19.75 20,19.75 22,17.75 R63.1@22,16.05
NetLD4_1: LD4.1 R64.1 | length 5.4
  Top w0.203: LD4.1@2.75,15.25 2.75,14.25 4.25,12.75 6.2,12.75 R64.1@6.45,12.5
NetLD4_3: LD4.3 R65.1 | length 8.3
  Top w0.203: LD4.3@7.83,15.25 7.83,15.83 9.25,17.25 12,17.25 13.2,16.05 R65.1@13.2,14.75
NetLD5_1: LD5.1 R67.1 | length 15.6
  Top w0.127: LD5.1@2.75,89.25 3.819,89.25 4.859,90.291 8.704,90.291 9.784,91.371 9.784,92.284 10.475,92.975 10.629,92.975 11.431,93.777 11.431,94.609 11.711,94.889 11.933,94.889 12.191,95.147 12.191,95.206 12.986,96 R67.1@14.45,96
NetLD5_3: LD5.3 R66.1 | length 14.4
  Top w0.127: LD5.3@7.83,89.25 8.023,89.25 10.353,91.581 10.353,92.362 10.713,92.721 10.855,92.721 11.685,93.55 11.685,94.504 11.796,94.616 12.23,94.616 12.84,95.225 16.089,95.225 16.353,94.962 16.353,94.948 16.611,94.69 16.976,94.69 17.45,95.164 R66.1@17.45,96
NetR4A_1: R4A.1 SW1A.4 | length 6.4
  Top w0.203: R4A.1@46.208,83.267 R4A.1@46.25,83.225
  Top w0.762: SW1A.4@43.142,86.71 45.923,86.71 46.208,86.425 R4A.1@46.208,83.267
NetR4B_1: R4B.1 SW1B.4 | length 6.4
  Top w0.203: R4B.1@46.208,73.267 R4B.1@46.25,73.225
  Top w0.762: SW1B.4@43.142,76.71 45.923,76.71 46.208,76.425 R4B.1@46.208,73.267
NetR4C_1: R4C.1 SW1C.4 | length 6.4
  Top w0.203: R4C.1@46.221,63.223 R4C.1@46.263,63.181
  Top w0.762: SW1C.4@43.155,66.666 45.936,66.666 46.221,66.381 R4C.1@46.221,63.223
NetR4D_1: R4D.1 SW1D.4 | length 6.4
  Top w0.203: R4D.1@46.208,53.267 R4D.1@46.25,53.225
  Top w0.762: SW1D.4@43.142,56.71 45.923,56.71 46.208,56.425 R4D.1@46.208,53.267
NetR4E_1: R4E.1 SW1E.4 | length 6.4
  Top w0.203: R4E.1@46.208,43.267 R4E.1@46.25,43.225
  Top w0.762: SW1E.4@43.142,46.71 45.923,46.71 46.208,46.425 R4E.1@46.208,43.267
NetR4F_1: R4F.1 SW1F.4 | length 6.4
  Top w0.203: R4F.1@46.208,33.267 R4F.1@46.25,33.225
  Top w0.762: SW1F.4@43.142,36.71 45.923,36.71 46.208,36.425 R4F.1@46.208,33.267
NetR4G_1: R4G.1 SW1G.4 | length 6.4
  Top w0.203: R4G.1@46.208,23.267 R4G.1@46.25,23.225
  Top w0.762: SW1G.4@43.142,26.71 45.923,26.71 46.208,26.425 R4G.1@46.208,23.267
NetR4H_1: R4H.1 SW1H.4 | length 6.4
  Top w0.203: R4H.1@46.208,13.267 R4H.1@46.25,13.225
  Top w0.762: SW1H.4@43.142,16.71 45.923,16.71 46.208,16.425 R4H.1@46.208,13.267
NetR33A_2: R33A.2 R34A.1 R35A.2 | length 3
  Top w0.203: R33A.2@58.908,88.48 R35A.2@60.432,88.48 61.88,88.48 R34A.1@61.918,88.442
NetR33B_2: R33B.2 R34B.1 R35B.2 | length 3
  Top w0.203: R33B.2@58.908,78.48 61.88,78.48 R34B.1@61.918,78.442
NetR33C_2: R33C.2 R34C.1 R35C.2 | length 3
  Top w0.203: R33C.2@58.921,68.436 61.893,68.436 R34C.1@61.931,68.398
NetR33D_2: R33D.2 R34D.1 R35D.2 | length 3
  Top w0.203: R33D.2@58.908,58.48 R35D.2@60.432,58.48 61.88,58.48 R34D.1@61.918,58.442
NetR33E_2: R33E.2 R34E.1 R35E.2 | length 3
  Top w0.203: R33E.2@58.908,48.48 61.88,48.48 R34E.1@61.918,48.442
NetR33F_2: R33F.2 R34F.1 R35F.2 | length 3
  Top w0.203: R33F.2@58.908,38.48 R35F.2@60.432,38.48 61.88,38.48 R34F.1@61.918,38.442
NetR33G_2: R33G.2 R34G.1 R35G.2 | length 3
  Top w0.203: R33G.2@58.908,28.48 61.88,28.48 R34G.1@61.918,28.442
NetR33H_2: R33H.2 R34H.1 R35H.2 | length 3
  Top w0.203: R33H.2@58.908,18.48 R35H.2@60.432,18.48 61.88,18.48 R34H.1@61.918,18.442
NetR41A_2: R41A.2 R42A.1 R43A.2 | length 3.1
  Top w0.203: R41A.2@58.908,83.832 R43A.2@60.432,83.832 61.702,83.832 R42A.1@61.918,83.616
NetR41B_2: R41B.2 R42B.1 R43B.2 | length 3.1
  Top w0.203: R41B.2@58.908,73.832 61.702,73.832 R42B.1@61.918,73.616
NetR41C_2: R41C.2 R42C.1 R43C.2 | length 3.1
  Top w0.203: R41C.2@58.921,63.788 61.715,63.788 R42C.1@61.931,63.572
NetR41D_2: R41D.2 R42D.1 R43D.2 | length 3.1
  Top w0.203: R41D.2@58.908,53.832 61.702,53.832 R42D.1@61.918,53.616
NetR41E_2: R41E.2 R42E.1 R43E.2 | length 3.1
  Top w0.203: R41E.2@58.908,43.832 61.702,43.832 R42E.1@61.918,43.616
NetR41F_2: R41F.2 R42F.1 R43F.2 | length 3.1
  Top w0.203: R41F.2@58.908,33.832 R43F.2@60.432,33.832 61.702,33.832 R42F.1@61.918,33.616
NetR41G_2: R41G.2 R42G.1 R43G.2 | length 3.1
  Top w0.203: R41G.2@58.908,23.832 61.702,23.832 R42G.1@61.918,23.616
NetR41H_2: R41H.2 R42H.1 R43H.2 | length 3.1
  Top w0.203: R41H.2@58.908,13.832 R43H.2@60.432,13.832 61.702,13.832 R42H.1@61.918,13.616
NetR58_2: R58.2 T1.3 | length 3.6
  Top w0.203: T1.3@11.25,91.6 11.35,91.5 12,91.5 12.75,90.75 R58.2@12.75,89.05
NetR59_2: R59.2 T2.3 | length 2.4
  Top w0.203: T2.3@14.75,90.1 15.45,90.1 15.8,89.75 R59.2@15.8,88.5
NetR60_2: R60.2 T3.3 | length 2.3
  Top w0.203: T3.3@18.5,90 19,90 19.25,89.75 19.25,88.6 R60.2@19.05,88.4
NetR61_2: R61.2 T4.3 | length 2.4
  Top w0.203: T4.3@22.5,90 23.25,90 23.3,89.95 R61.2@23.3,88.4
NetR62_2: R62.2 T5.3 | length 1.5
  Top w0.127: T5.3@18.25,12.9 R62.2@18.25,14.45
NetR63_2: R63.2 T6.3 | length 1.5
  Top w0.127: T6.3@22,12.9 R63.2@22,14.45
NetR64_2: R64.2 T7.3 | length 2.8
  Top w0.203: R64.2@8.05,12.5 10.6,12.5 T7.3@10.75,12.65
NetR65_2: R65.2 T8.3 | length 1.9
  Top w0.203: T8.3@14.75,12.9 14.75,14.7 R65.2@14.8,14.75
NetRN1A_4: RN1A.4 RN1A.8 | length 8.1
  Top w0.203: RN1A.8@74.58,86.88 74.58,85.085 75.485,84.18 76.853,84.18 76.902,84.229 77.298,84.229 78.39,83.137 RN1A.4@78.39,81.48
NetRN1A_5: RN1A.5 RN1A.6 | length 4
  Top w0.203: RN1A.6@77.114,86.977 77.114,85.636 77.35,85.4 77.975,85.4 78.384,85.809 RN1A.5@78.384,86.977
NetRN1B_4: RN1B.4 RN1B.8 | length 8.1
  Top w0.203: RN1B.8@74.58,76.88 74.58,75.085 75.485,74.18 76.853,74.18 76.902,74.229 77.298,74.229 78.39,73.137 RN1B.4@78.39,71.48
NetRN1B_5: RN1B.5 RN1B.6 | length 4
  Top w0.203: RN1B.6@77.114,76.977 77.114,75.636 77.35,75.4 77.975,75.4 78.384,75.809 RN1B.5@78.384,76.977
NetRN1C_4: RN1C.4 RN1C.8 | length 8.1
  Top w0.203: RN1C.8@74.593,66.836 74.593,65.041 75.498,64.136 76.866,64.136 76.914,64.185 77.311,64.185 78.403,63.093 RN1C.4@78.403,61.436
NetRN1C_5: RN1C.5 RN1C.6 | length 4
  Top w0.203: RN1C.6@77.127,66.933 77.127,65.592 77.363,65.356 77.988,65.356 78.397,65.766 RN1C.5@78.397,66.933
NetRN1D_4: RN1D.4 RN1D.8 | length 8.1
  Top w0.203: RN1D.8@74.58,56.88 74.58,55.085 75.485,54.18 76.853,54.18 76.902,54.229 77.298,54.229 78.39,53.137 RN1D.4@78.39,51.48
NetRN1D_5: RN1D.5 RN1D.6 | length 4
  Top w0.203: RN1D.6@77.1,57.05 77.1,55.708 77.336,55.473 77.961,55.473 78.37,55.882 RN1D.5@78.37,57.05
NetRN1E_4: RN1E.4 RN1E.8 | length 8.1
  Top w0.203: RN1E.8@74.58,46.88 74.58,45.085 75.485,44.18 76.853,44.18 76.902,44.229 77.298,44.229 78.39,43.137 RN1E.4@78.39,41.48
NetRN1E_5: RN1E.5 RN1E.6 | length 4
  Top w0.203: RN1E.6@77.114,46.977 77.114,45.636 77.35,45.4 77.975,45.4 78.384,45.809 RN1E.5@78.384,46.977
NetRN1F_4: RN1F.4 RN1F.8 | length 8.1
  Top w0.203: RN1F.8@74.58,36.88 74.58,35.085 75.485,34.18 76.853,34.18 76.902,34.229 77.298,34.229 78.39,33.137 RN1F.4@78.39,31.48
NetRN1F_5: RN1F.5 RN1F.6 | length 4
  Top w0.203: RN1F.6@77.114,36.977 77.114,35.636 77.35,35.4 77.975,35.4 78.384,35.809 RN1F.5@78.384,36.977
NetRN1G_4: RN1G.4 RN1G.8 | length 8.1
  Top w0.203: RN1G.8@74.58,26.88 74.58,25.085 75.485,24.18 76.853,24.18 76.902,24.229 77.298,24.229 78.39,23.137 RN1G.4@78.39,21.48
NetRN1G_5: RN1G.5 RN1G.6 | length 4
  Top w0.203: RN1G.6@77.114,26.977 77.114,25.636 77.35,25.4 77.975,25.4 78.384,25.809 RN1G.5@78.384,26.977
NetRN1H_4: RN1H.4 RN1H.8 | length 8.1
  Top w0.203: RN1H.8@74.58,16.88 74.58,15.085 75.485,14.18 76.853,14.18 76.902,14.229 77.298,14.229 78.39,13.137 RN1H.4@78.39,11.48
NetRN1H_5: RN1H.5 RN1H.6 | length 4
  Top w0.203: RN1H.6@77.114,16.977 77.114,15.636 77.35,15.4 77.975,15.4 78.384,15.809 RN1H.5@78.384,16.977
NetRN3_1: RN3.1 RN3.2 | length 4.5
  Top w0.203: RN3.2@103.275,56.74 102.29,56.74 101.9,56.35 101.9,55.65 102.08,55.47 RN3.1@103.275,55.47 103.275,54.65 v1(103.3,54.625)
NetRN3_4: RN3.4 RN3.8 | length 8.3
  Top w0.203: RN3.8@97.875,55.47 100.17,55.47 v1(101.45,56.75) ; v1(101.525,59.075) 101.73,59.28 RN3.4@103.275,59.28
  L3 w0.203: v1(101.45,56.75) 101.525,56.825 v1(101.525,59.075)
P2V5A: C7.2 C8.2 C9.2 C47.2 C55.2 C56.1 C67.2 IC2.31 IC2.37 IC7.5 IC23.1 R2.1 R11.1 R53.2 TP10.1 | length 119.9
  Top w0.254: IC2.31@102.595,41.285 102.95,41.285 103.046,41.381 103.689,41.381 103.984,41.086 103.984,40.791 C8.2@104.75,40.025 v1(105.55,40.025) 106.275,40.75 107,40.75 107.25,41 107.25,43.75 106.5,44.5 105.05,44.5 C7.2@104.5,43.95 104.165,44.285 103.814,44.285 103.734,44.366 103.316,44.366 103.236,44.285 IC2.37@102.595,44.285 ; R11.1@102.95,35.275 102.95,34.65 v1(103.35,34.25) ; C9.2@108,43.35 109.55,43.35 111.05,41.85 C56.1@111.05,41 ; C55.2@111.95,39 111.95,40.449 112,40.499 IC7.5@113.451,40.499 ; R53.2@113.28,41.75 113.28,40.67 IC7.5@113.451,40.499 ; TP10.1@118.75,40 v1(117.775,40) 117,40 116.25,39.25 113.75,39.25 113.451,39.549 IC7.5@113.451,40.499 ; R2.1@119.715,21.984 120.497,21.984 v1(120.919,22.406) ; v1(144.6,30.85) 144.642,30.892 C67.2@144.642,31.522 144.728,31.436 IC23.1@145.966,31.436
  L3 w0.254: v1(103.35,34.25) 104.15,34.25 105.55,35.65 v1(105.55,40.025)
  Bot w0.254: v1(117.775,40) 119.185,40 120.56,41.375 125.725,41.375 127.675,43.325 128,43.325 129.996,45.321 131.009,45.321 131.688,46 141.3,46 143.925,43.375 143.925,33.085 144.6,32.41 v1(144.6,30.85) 144.6,29.6 142.4,27.4 136.429,27.4 134.404,25.375 128.575,25.375 125.925,28.025 119.4,28.025 118.65,27.275 118.65,26.539 120.919,24.27 v1(120.919,22.406)